# Altium PCB AMBIT-panel.PcbDoc
Units mm, origin at the board's own origin, x right, y up, seen from the top; angles counter-clockwise.
Board outline 117.17 x 218.69 mm, 4 copper layers (Top Layer, Ground Plane, Power Plane, Bottom Layer), stack 1.504 mm thick; 8 components, 0 nets, 12 pads, 0 vias.
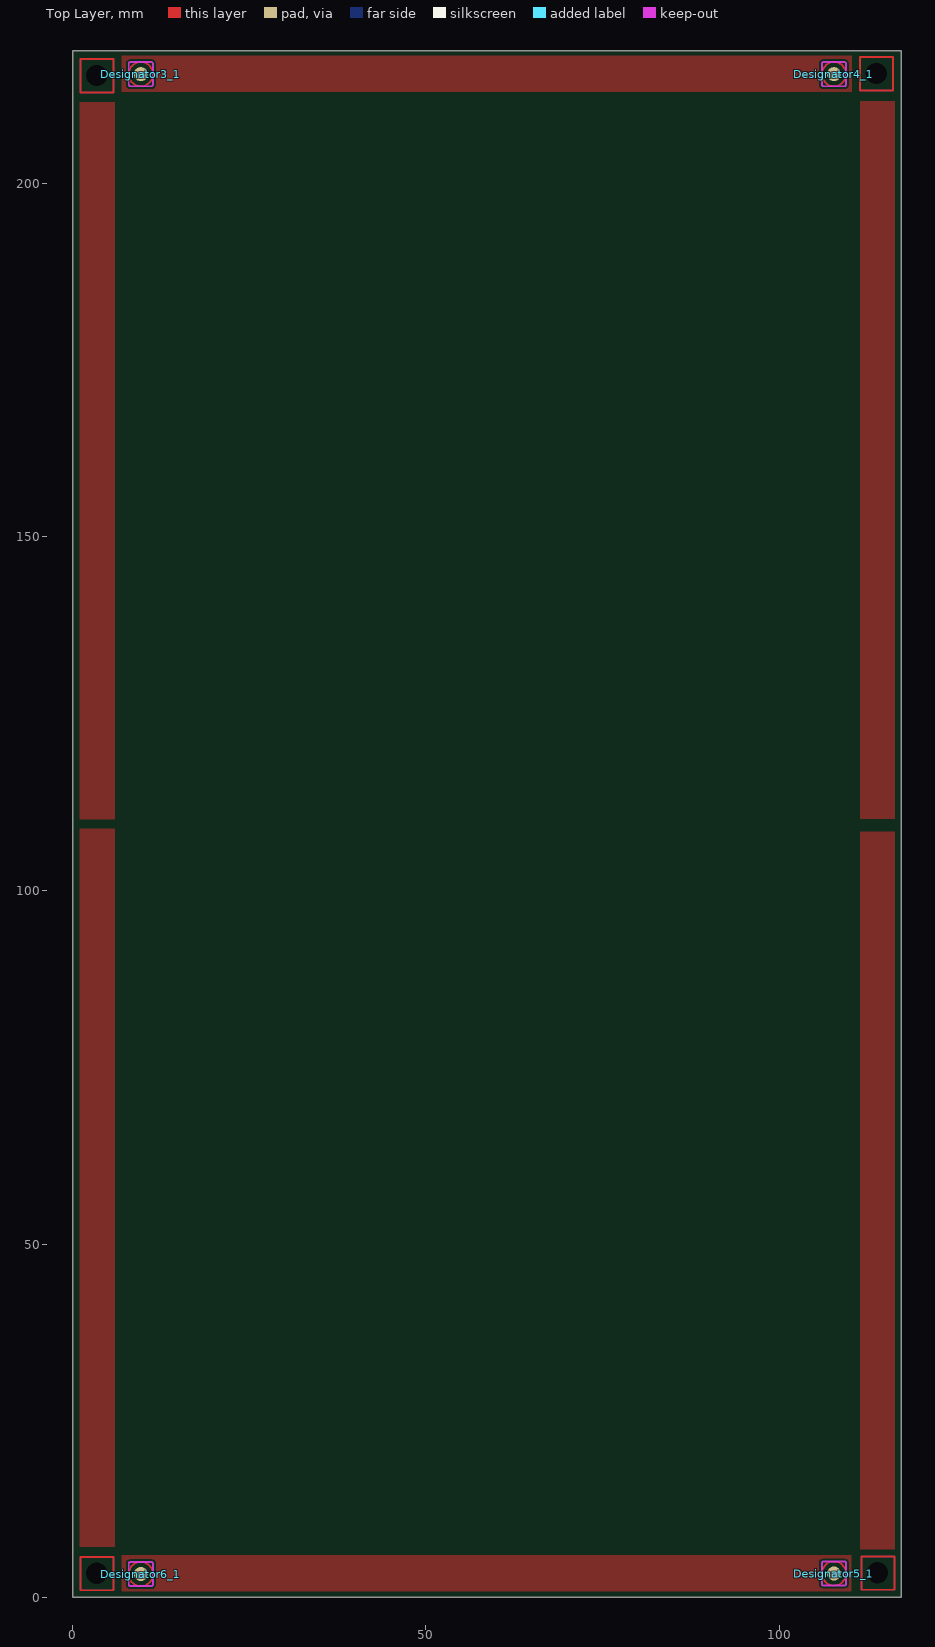
[diagram p0: Top Layer view]
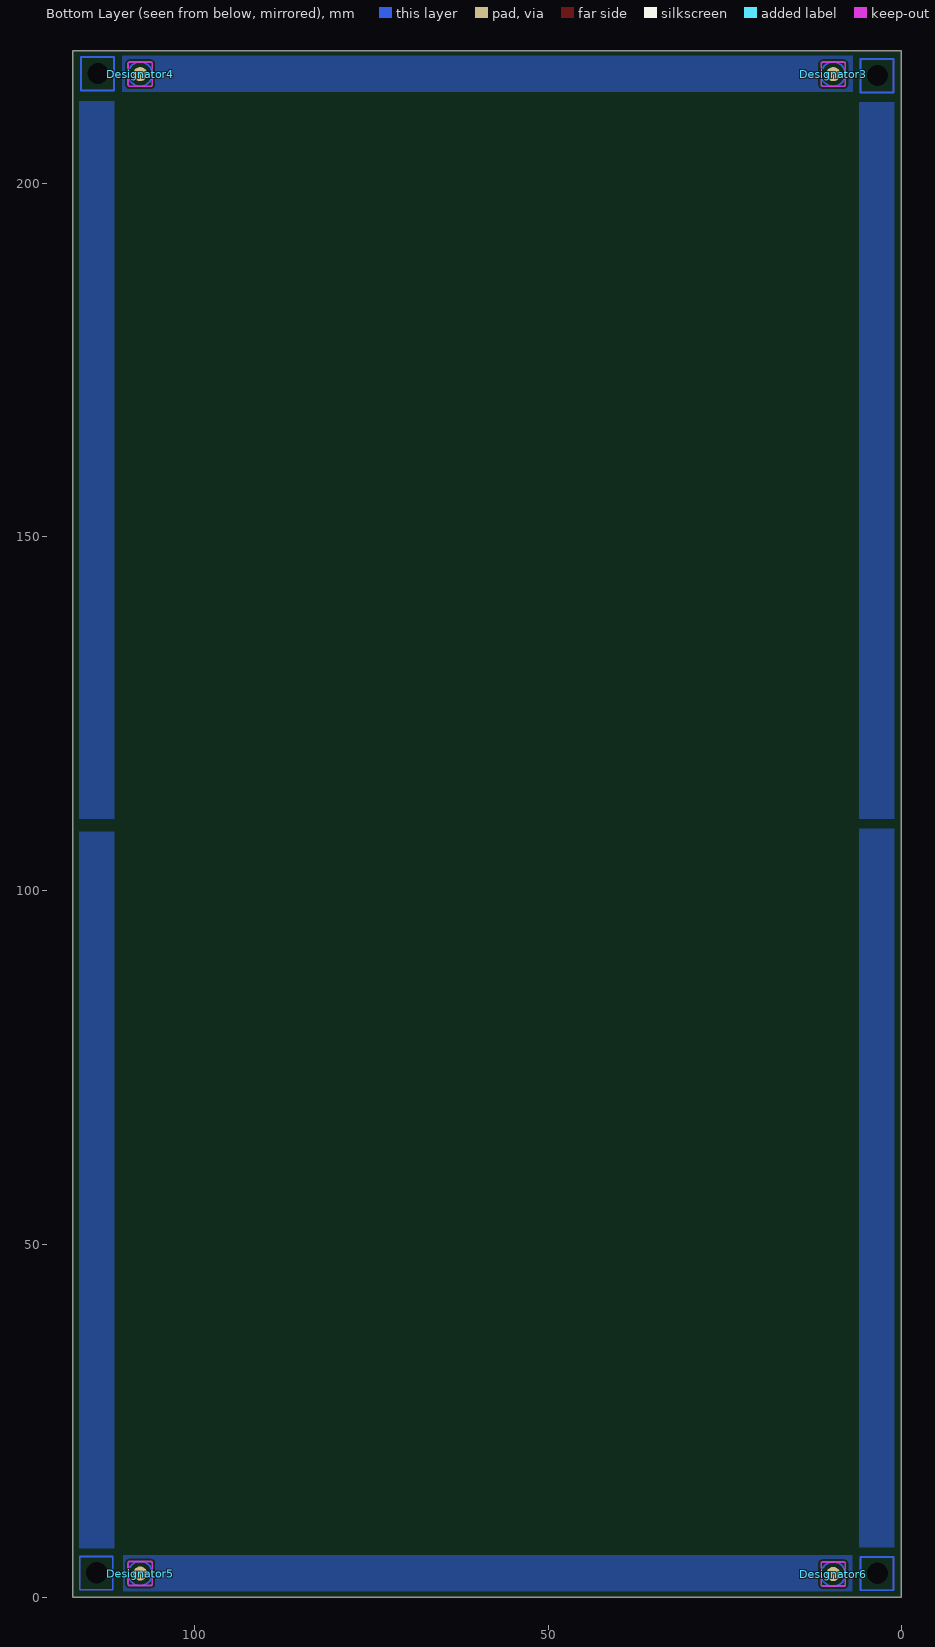
[diagram p1: Bottom Layer view, seen from below]
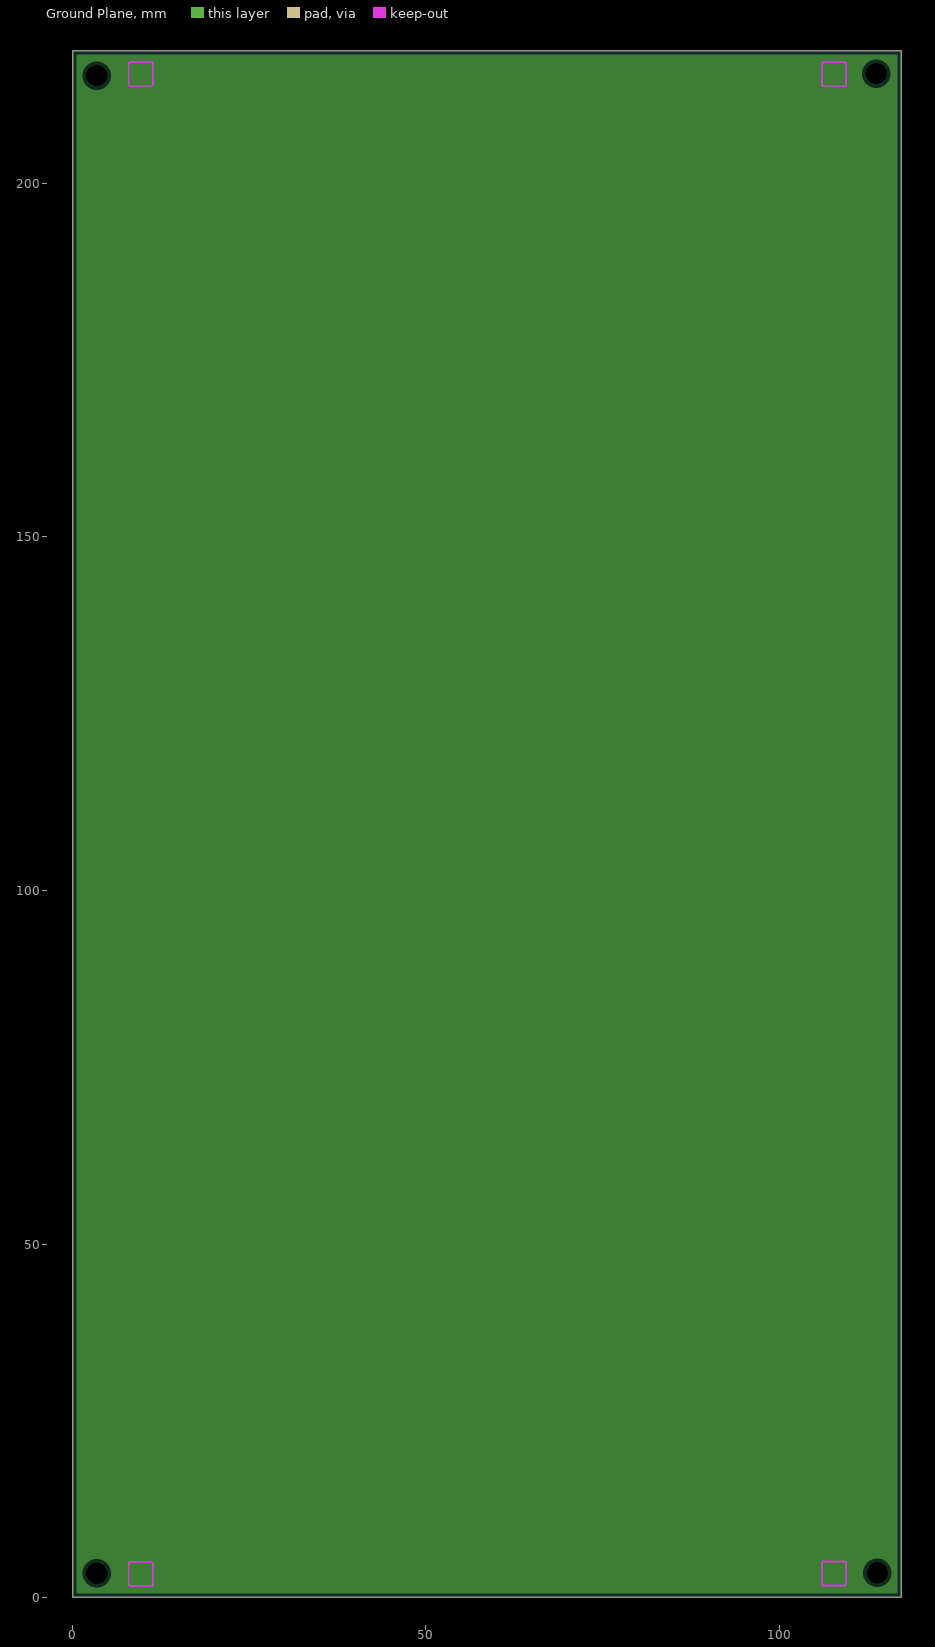
[diagram p2: Ground Plane, clearances drawn from the general rule]
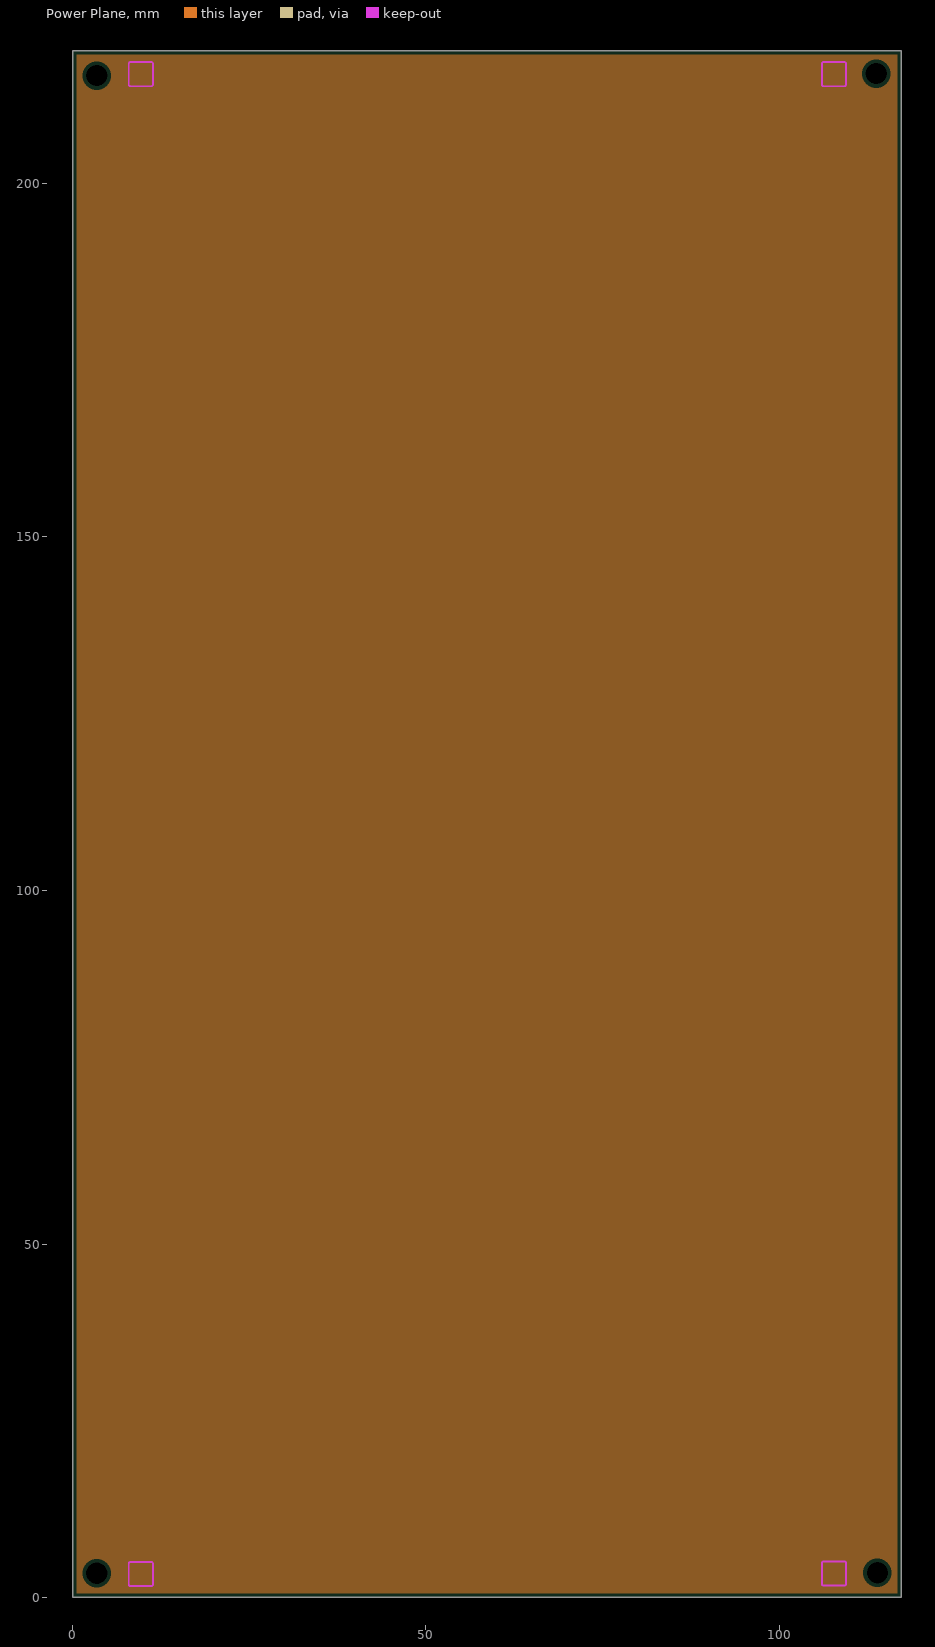
[diagram p3: Power Plane, clearances drawn from the general rule]

## Layer stack, top to bottom
Top Solder: solder mask 0.0102, Solder Resist, Dk 3.5
Top Layer: signal copper 0.0711
Dielectric1: prepreg 0.1372, FR-4 TG170, Dk 4.6
Ground Plane: plane copper 0.0356
Dielectric2: core 1.016, FR-4 TG170, Dk 4.6
Power Plane: plane copper 0.0356
Dielectric3: prepreg 0.1372, FR-4 TG170, Dk 4.6
Bottom Layer: signal copper 0.0711
Bottom Solder: solder mask 0.0102, Solder Resist, Dk 3.5

## Board outline
0.055,0.055 0.055,218.742 117.221,218.742 117.221,0.055

## Design rules (kind name [scope] priority, off if disabled: settings)
Clearance [All] p1: gap=0.254
PlaneClearance [All] p1: clearance=0.508
PlaneConnect [All] p1: planeconnectstyle=Relief reliefexpansion=0.508 reliefentries=4 reliefconductorwidth=0.254 reliefairgap=0.254
PolygonConnect [All] p1: connectstyle=Relief reliefconductorwidth=0.254 reliefentries=4 polygonreliefangle="90 Angle" airgapwidth=0.254
RoutingVias [All] p1: holewidth=0.711 width=1.27 viastyle="Through Hole" minholewidth=0.711 minwidth=1.27 maxholewidth=0.711 maxwidth=1.27
SolderMaskExpansion [All] p1: expansion=0.102
Width [All] p1: maxlimit=0.254 minlimit=0.254 preferedwidth=0.254
28 further rules are at their usual default settings.

## Components (designator, comment, footprint, x,y, rotation, side; value= is the part's Value field where it differs from the comment)
Designator3 "Comment" FIDUCIAL-2X3-PANEL 9.68,215.44 r90 bottom
Designator3_1 "Comment" FIDUCIAL-2X3-PANEL 9.68,215.44 r90 top
Designator4 "Comment" FIDUCIAL-2X3-PANEL 107.695,215.44 r90 bottom
Designator4_1 "Comment" FIDUCIAL-2X3-PANEL 107.695,215.44 r90 top
Designator5 "Comment" FIDUCIAL-2X3-PANEL 107.695,3.405 r90 bottom
Designator5_1 "Comment" FIDUCIAL-2X3-PANEL 107.695,3.405 r90 top
Designator6 "Comment" FIDUCIAL-2X3-PANEL 9.68,3.33 r90 bottom
Designator6_1 "Comment" FIDUCIAL-2X3-PANEL 9.68,3.33 r90 top

## Footprints (in the part's own frame and the unit in brackets; to place one, negate y for a bottom-side part, rotate by r counter-clockwise, add the part's x,y. Pads: shape width x height; smd on the part's side, far side on the other; paste and mask are expansions set on the pad)
FIDUCIAL-2X3-PANEL [mm]
  rrect100% 2x2 smd paste+0 mask+0.508: 1(0,0)
  Top Layer circle w0.178: c0,0 r1.7
  Keep-Out Layer lines w0.254: -1.5,-1.7 cw(c-1.5,-1.5) -1.7,-1.5 -1.7,1.5 cw(c-1.5,1.5) -1.5,1.7 1.5,1.7 cw(c1.5,1.5) 1.7,1.5 1.7,-1.5 cw(c1.5,-1.5) 1.5,-1.7 -1.5,-1.7
  body extent -1.01,-1.01 1.02,1.01, height 0.02

## Free pads (board coordinates)
  round 0 hole 3 unplated paste-99 mask-0.102: 0(3.43,3.43) 1(113.845,3.505) 2(113.665,215.519) 3(3.43,215.237)

## Nets (pads, with @x,y where several pads share a name; then routed paths per layer and width w, separated by ;. In a path a pad name is that pad's centre, name@x,y a point inside that pad or via, vN(x,y) a via of type N, cw(c..) or ccw(c..) an arc to the next point about the centre after c; other vN are vias at no path point)
pads on no net: Designator3.1 Designator3_1.1 Designator4.1 Designator4_1.1 Designator5.1 Designator5_1.1 Designator6.1 Designator6_1.1
copper on no net: | length 150.4
  Top Layer w0.254: 1.155,1.03 1.155,5.755 5.83,5.755 5.83,1.03 1.155,1.03 ; 1.155,212.837 5.83,212.837 5.83,217.562 1.155,217.562 1.155,212.837 ; 111.379,213.119 111.379,217.844 116.065,217.844 116.065,213.119 111.379,213.119 ; 111.57,1.105 111.57,5.83 116.245,5.83 116.245,1.105 111.57,1.105
  Bottom Layer w0.254: 1.155,1.03 1.155,5.755 5.83,5.755 5.83,1.03 1.155,1.03 ; 1.155,212.837 1.155,217.562 5.83,217.562 5.83,212.837 1.155,212.837 ; 111.39,213.119 111.39,217.844 116.065,217.844 116.065,213.119 111.39,213.119 ; 111.57,1.105 116.245,1.105 116.245,5.83 111.57,5.83 111.57,1.105

## Polygon pours and split planes (outlines as drawn)
no net on Top Layer "Frame-Copper" (solid, pour order 49): 5.968,211.455 5.968,110.084 7.193,110.084 1.043,110.084 1.043,211.455
no net on Top Layer "Frame-Copper" (solid, pour order 41): 7.005,0.905 110.109,0.905 110.109,5.98 7.005,5.98
no net on Top Layer "Frame-Copper" (solid, pour order 39): 6.948,212.969 110.236,212.969 110.236,218.044 6.948,218.044
no net on Top Layer "Frame-Copper" (solid, pour order 47): 5.969,108.712 5.969,7.156 7.194,7.156 1.044,7.156 1.044,108.712
no net on Top Layer "Frame-Copper" (solid, pour order 45): 116.304,108.331 116.304,6.858 117.529,6.858 111.379,6.858 111.379,108.331
no net on Top Layer "Frame-Copper" (solid, pour order 44): 116.304,211.582 116.304,110.109 117.529,110.109 111.379,110.109 111.379,211.582
no net on Bottom Layer "Frame-Copper" (solid, pour order 40): 7.005,0.905 110.109,0.905 110.109,5.98 7.005,5.98
no net on Bottom Layer "Frame-Copper" (solid, pour order 46): 5.969,108.712 5.969,7.105 7.194,7.105 1.044,7.105 1.044,108.712
no net on Bottom Layer "Frame-Copper" (solid, pour order 48): 5.969,211.455 5.969,110.109 7.194,110.109 1.044,110.109 1.044,211.455
no net on Bottom Layer "Frame-Copper" (solid, pour order 38): 6.944,212.945 110.236,212.945 110.236,218.02 6.944,218.02
no net on Bottom Layer "Frame-Copper" (solid, pour order 43): 116.304,211.582 116.304,110.109 117.529,110.109 111.379,110.109 111.379,211.582
no net on Bottom Layer "Frame-Copper" (solid, pour order 42): 116.304,108.331 116.304,6.96 117.529,6.96 111.379,6.96 111.379,108.331
no net on Ground Plane (split plane): 116.711,0.565 0.565,0.565 0.565,218.232 116.711,218.232
no net on Power Plane (split plane): 116.711,0.565 0.565,0.565 0.565,218.232 116.711,218.232

## Silkscreen, mask and mechanical layers (free items; w line width, h text height)
Mechanical 2:
  drawing of 295 lines, arcs and shapes, not listed
  text "NOTES (UNLESS SPECIFIED OTHERWISE)" at 139.74,214.797 h2.03
  text "1. FABRICATE PCB IN ACCORDANCE WITH IPC-A-600 CLASS 2 (LATEST REVISION)" at 142.24,207.297 h2.03
  text "2. THE PCB MUST BE LEAD FREE ASSEMBLY PROCESS COMPATIBLE." at 142.24,199.797 h2.03
  text "MUST HANDLE MINIMUM 6 CYCLES - 260C FOR 10 SECONDS." at 147.193,195.834 h2.03
  text "3. LAMINATE AND PREPREG TO BE FR4 TG170" at 142.24,189.797 h2.03
  text "4. PLATING FINISH - BOTH SIDES ENIG GOLD PLATED" at 142.24,182.297 h2.03
  text "5. SOLDERMASK - BOTH SIDES GREEN" at 142.24,174.797 h2.03
  text "6. SOLDER SAMPLES TO BE PROVIDED" at 142.24,167.297 h2.03
  text "7. FINISHED PCB MUST BE MANELIZED FOR ASSEMBLY." at 142.24,159.797 h2.03
  text "8. SILKSCREEN - WHITE EPOXY INK, BOTH SIDES. NO SILK ON PADS" at 142.24,152.537 h2.03
  text "9. SUPPLIER MARKING - ON SOLDER SIDE" at 142.24,145.037 h2.03
  text "ADD ROHS LOGO" at 147.24,140.037 h2.03
  text "ADD UL MARKING AND ID" at 147.24,135.037 h2.03
  text "10. LAYER STACKUP - SEE DETAIL A" at 142.24,127.537 h2.03
  text "DETAIL A" at 140.97,112.141 h2.29
  text "File" at 145.542,108.331 h1.52
  text "Layer" at 153.162,108.331 h1.52
  text "Name" at 163.574,108.331 h1.52
  text "Material" at 187.189,108.331 h1.52
  text "Thickness" at 209.027,108.331 h1.52
  text "Constant" at 225.533,108.331 h1.52
  text "Board Layer Stack" at 240.008,108.331 h1.52
  text "1" at 153.162,105.283 h1.52
  text "Top Overlay" at 163.574,105.283 h1.52
  text "GTO" at 145.791,104.934 h1.52
  text "2" at 153.162,102.235 h1.52
  text "Top Solder" at 163.574,102.235 h1.52
  text "Solder Resist" at 187.189,102.235 h1.52
  text "0.010mm" at 209.027,102.235 h1.52
  text "3.5" at 225.533,102.235 h1.52
  text "GTS" at 145.791,101.886 h1.52
  text "3" at 153.162,99.187 h1.52
  text "Top Layer" at 163.574,99.187 h1.52
  text "Copper" at 187.189,99.187 h1.52
  text "0.071mm" at 209.027,99.187 h1.52
  text "GTL" at 145.791,98.838 h1.52
  text "4" at 153.162,96.139 h1.52
  text "Dielectric1" at 163.574,96.139 h1.52
  text "FR-4 TG170" at 187.189,96.139 h1.52
  text "0.137mm" at 209.027,96.139 h1.52
  text "4.6" at 225.533,96.139 h1.52
  text "5" at 153.162,93.091 h1.52
  text "Ground Plane" at 163.574,93.091 h1.52
  text "Copper" at 187.189,93.091 h1.52
  text "0.036mm" at 209.027,93.091 h1.52
  text "GP1" at 145.791,92.742 h1.52
  text "6" at 153.162,90.043 h1.52
  text "Dielectric2" at 163.574,90.043 h1.52
  text "FR-4 TG170" at 187.189,90.043 h1.52
  text "1.016mm" at 209.027,90.043 h1.52
  text "4.6" at 225.533,90.043 h1.52
  text "7" at 153.162,86.995 h1.52
  text "Power Plane" at 163.574,86.995 h1.52
  text "Copper" at 187.189,86.995 h1.52
  text "0.036mm" at 209.027,86.995 h1.52
  text "GP2" at 145.791,86.646 h1.52
  text "8" at 153.162,83.947 h1.52
  text "Dielectric3" at 163.574,83.947 h1.52
  text "FR-4 TG170" at 187.189,83.947 h1.52
  text "0.137mm" at 209.027,83.947 h1.52
  text "4.6" at 225.533,83.947 h1.52
  text "GBL" at 145.791,81.058 h1.52
  text "9" at 153.162,80.899 h1.52
  text "Bottom Layer" at 163.574,80.899 h1.52
  text "Copper" at 187.189,80.899 h1.52
  text "0.071mm" at 209.027,80.899 h1.52
  text "10" at 153.162,77.851 h1.52
  text "Bottom Solder" at 163.574,77.851 h1.52
  text "Solder Resist" at 187.189,77.851 h1.52
  text "0.010mm" at 209.027,77.851 h1.52
  text "3.5" at 225.533,77.851 h1.52
  text "GBS" at 145.791,77.502 h1.52
  text "11" at 153.162,74.803 h1.52
  text "Bottom Overlay" at 163.574,74.803 h1.52
Drill Drawing:
  drawing of 170 lines, arcs and shapes, not listed
  text "Symbol" at 146.479,60.96 h1.83
  text "Hit Count" at 159.328,60.96 h1.83
  text "Finished Hole Size" at 177.052,60.96 h1.83
  text "Plated" at 211.231,60.96 h1.83
  text "Hole Type" at 224.08,60.96 h1.83
  text "2" at 159.328,57.15 h1.52
  text "0.508mm (20.00mil)" at 177.052,57.15 h1.52
  text "PTH" at 211.231,57.15 h1.52
  text "Round" at 224.08,57.15 h1.52
  text "4" at 159.328,53.34 h1.52
  text "0.559mm (22.00mil)" at 177.052,53.34 h1.52
  text "PTH" at 211.231,53.34 h1.52
  text "Round" at 224.08,53.34 h1.52
  text "4" at 159.328,49.53 h1.52
  text "0.762mm (30.00mil)" at 177.052,49.53 h1.52
  text "PTH" at 211.231,49.53 h1.52
  text "Round" at 224.08,49.53 h1.52
  text "4" at 159.328,45.72 h1.52
  text "1.499mm (59.00mil)" at 177.052,45.72 h1.52
  text "PTH" at 211.231,45.72 h1.52
  text "Round" at 224.08,45.72 h1.52
  text "4" at 159.328,41.91 h1.52
  text "2.210mm (87.00mil)" at 177.052,41.91 h1.52
  text "PTH" at 211.231,41.91 h1.52
  text "Round" at 224.08,41.91 h1.52
  text "6" at 159.328,38.1 h1.52
  text "3.300mm (129.92mil)" at 177.052,38.1 h1.52
  text "NPTH" at 211.231,38.1 h1.52
  text "Round" at 224.08,38.1 h1.52
  text "8" at 159.328,34.29 h1.52
  text "0.965mm (38.00mil)" at 177.052,34.29 h1.52
  text "PTH" at 211.231,34.29 h1.52
  text "Round" at 224.08,34.29 h1.52
  text "12" at 159.328,30.48 h1.52
  text "3.000mm (118.11mil)" at 177.052,30.48 h1.52
  text "NPTH" at 211.231,30.48 h1.52
  text "Round" at 224.08,30.48 h1.52
  text "14" at 159.328,26.67 h1.52
  text "0.610mm (24.00mil)" at 177.052,26.67 h1.52
  text "PTH" at 211.231,26.67 h1.52
  text "Round" at 224.08,26.67 h1.52
  text "24" at 159.328,22.86 h1.52
  text "1.600mm (63.00mil)" at 177.052,22.86 h1.52
  text "PTH" at 211.231,22.86 h1.52
  text "Round" at 224.08,22.86 h1.52
  text "32" at 159.328,19.05 h1.52
  text "1.397mm (55.00mil)" at 177.052,19.05 h1.52
  text "PTH" at 211.231,19.05 h1.52
  text "Round" at 224.08,19.05 h1.52
  text "88" at 159.328,15.24 h1.52
  text "0.900mm (35.43mil)" at 177.052,15.24 h1.52
  text "PTH" at 211.231,15.24 h1.52
  text "Round" at 224.08,15.24 h1.52
  text "124" at 159.328,11.43 h1.52
  text "1.016mm (40.00mil)" at 177.052,11.43 h1.52
  text "PTH" at 211.231,11.43 h1.52
  text "Round" at 224.08,11.43 h1.52
  text "2516" at 159.328,7.62 h1.52
  text "0.381mm (15.00mil)" at 177.052,7.62 h1.52
  text "PTH" at 211.231,7.62 h1.52
  text "Round" at 224.08,7.62 h1.52
  text "2842 Total" at 159.328,3.81 h1.52
Panel Dimension:
  lines w0.254: 0.051,0.051 0.051,155.551 ; 0.055,0.055 117.221,0.055 117.221,218.742 0.055,218.742 0.055,0.055
V-Score:
  lines w0.254: -0.051,109.375 117.246,109.375 ; 0.055,6.505 117.12,6.505 ; 0.232,212.245 117.222,212.245 ; 6.405,0.155 6.405,218.821 ; 110.745,-0.047 110.745,218.694

## Panel: embedded boards
"AMBIT.PcbDoc" at 6.505,6.505, 2 rows x 1 columns, spacing 102.87 x 104.14, rotation 0